# Altium PCB ProPrj_HTXStudio_OneHanded_Keyboard(1).PcbDoc (part 8 of 11)
Units mm, origin at the board's own origin, x right, y up, seen from the top; angles counter-clockwise.
Board outline 152.4 x 101.6 mm, 20 copper layers (F.Cu, F.Mask, B.Cu, B.Mask, In1.Cu, F.SilkS, In2.Cu, B.SilkS, F.Adhes, B.Adhes, F.Paste, B.Paste, Dwgs.User, Cmts.User, Eco1.User, Eco2.User, Edge.Cuts, Margin, B.CrtYd, F.CrtYd); 269 components, 0 nets, 747 pads, 1168 vias.
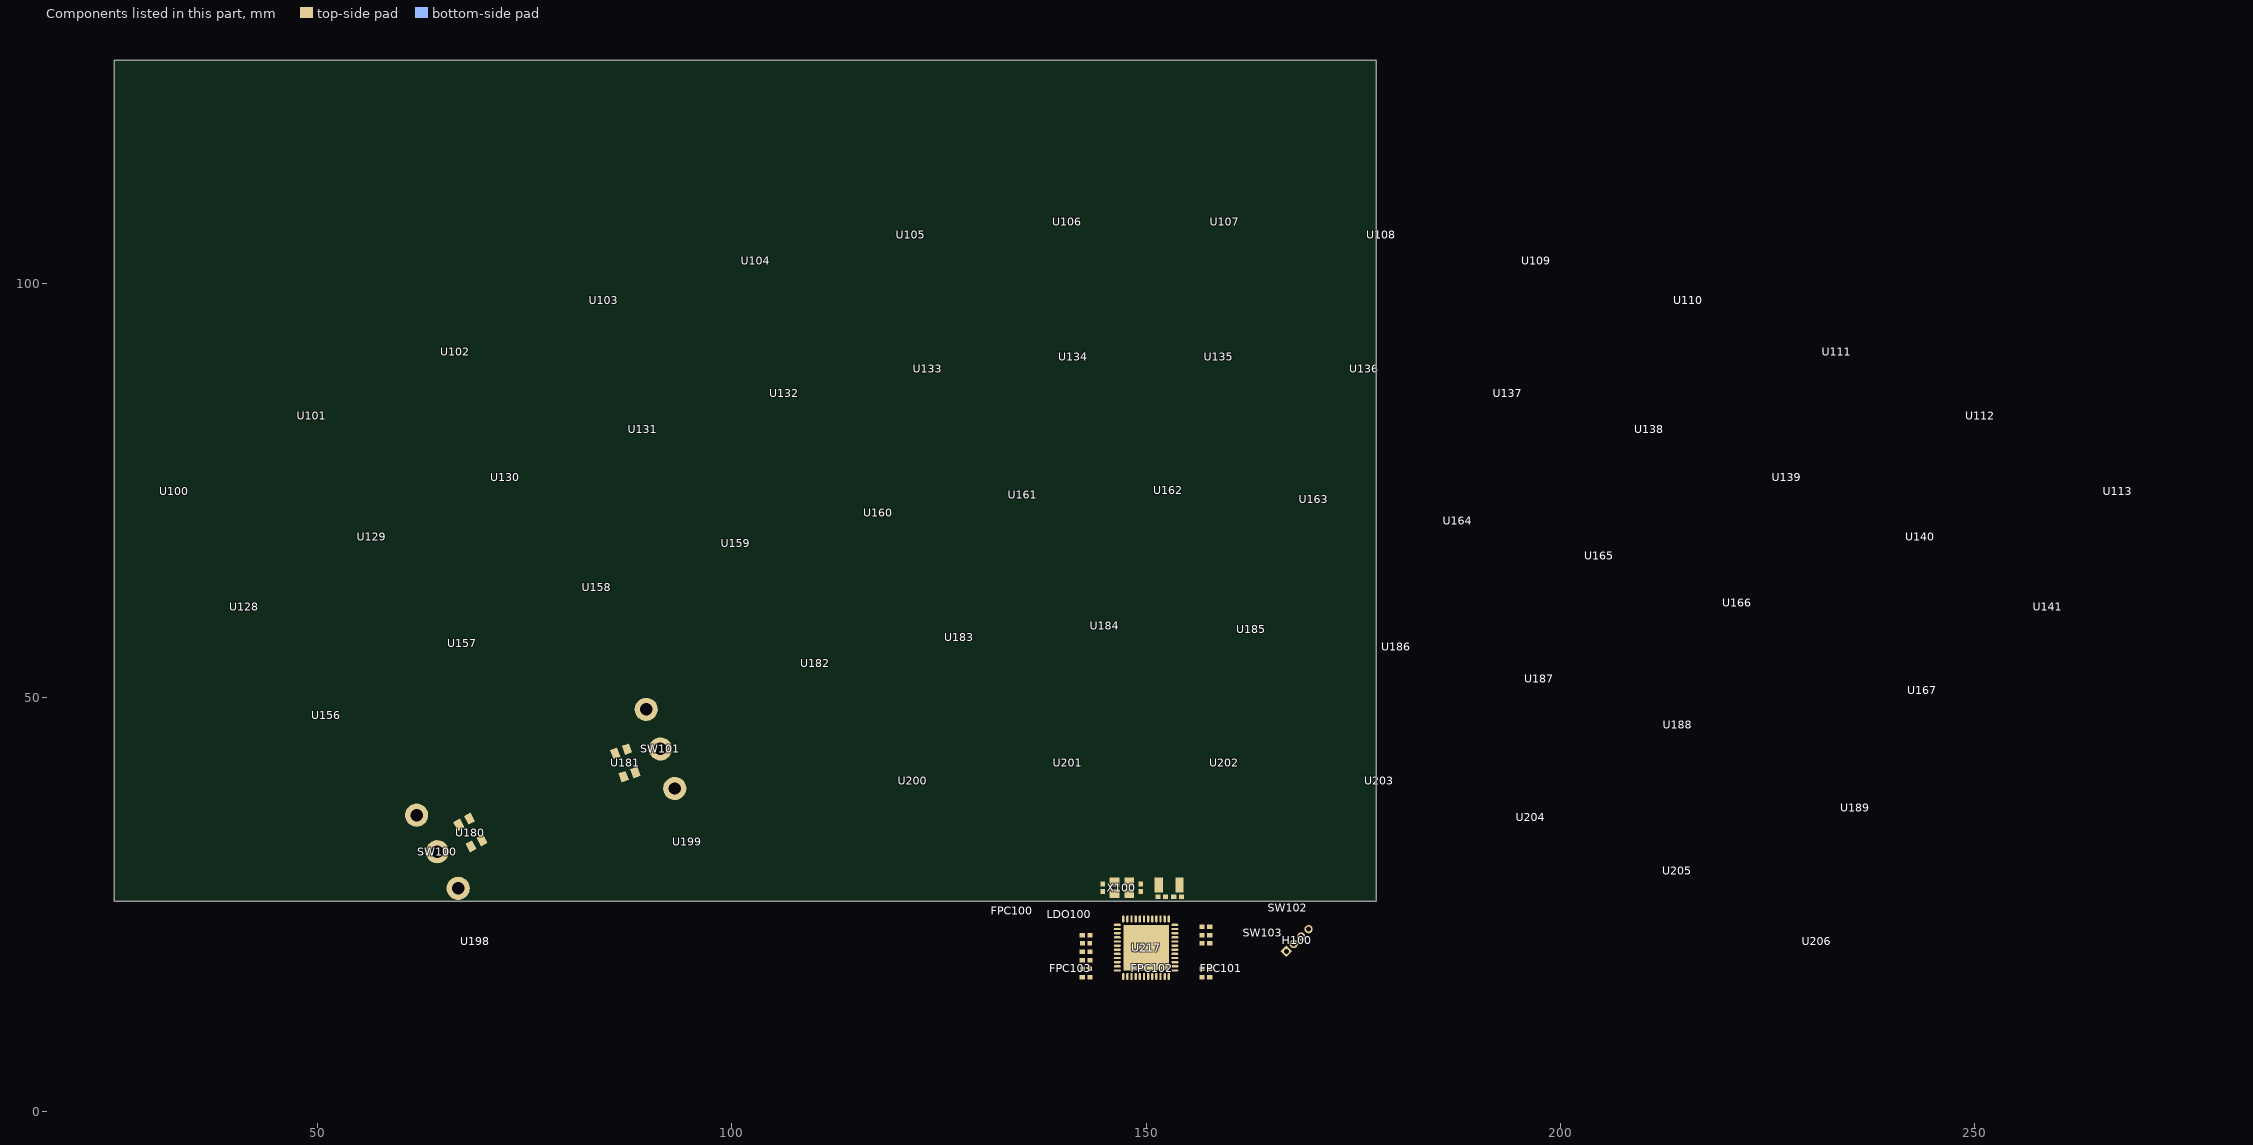
[diagram p20: the components of this part, seen from the top]

## Part data
C100 C101 C102 C103 C104 C105 C106 C107 C108 C109 C110 C111 C112 C113 C114 C115 C116 C117 C118 C119 C120 C121 C122 C123 C124 C125 C126 C127 C128 C129 C130 C131 C132 C133 C134 C135 C136 C137 C138 C139 C140 C141 C142 C143 C144 C145 C146 C147 C148 C149 C150 C151 C152 C153 C154 C155 C156: library part C0603, JLC_3DModel_Q=ac125912035d415993ca9572d50418b1, JLC_3D_Size="1.6 0.8", Manufacturer Part=CC0603KRX7R9BB104, MANUFACTURER=YAGEO(国巨), LCSC Part Name="100nF ±10% 50V", Datasheet=https://atta.szlcsc.com/upload/public/pdf/source/20180910/C282072_33301C7F631E79921B82A8DAC6BCC5B3.pdf, Description=容值:100nF;精度:±10%;额定电压:50V;材质(温度系数):X7R;, Supplier Part=C14663, Supplier=LCSC
C157 C158 C159 C160 C161 C162 C163 C164 C167: library part C0402, JLC_3DModel_Q=36a51122f27c49738f86b3bfa98863e0, JLC_3D_Size="1 0.5", Manufacturer Part=CL05B104KB54PNC, MANUFACTURER=SAMSUNG(三星), LCSC Part Name="100nF ±10% 50V", Datasheet=https://atta.szlcsc.com/upload/public/pdf/source/20160218/1457707763339.pdf, Description=容值:100nF;精度:±10%;额定电压:50V;材质(温度系数):X7R;, Supplier Part=C307331, Supplier=LCSC
C165 C166 C168 C169: library part C0402, JLC_3DModel_Q=36a51122f27c49738f86b3bfa98863e0, JLC_3D_Size="1 0.5", Manufacturer Part=CL05A105KA5NQNC, MANUFACTURER=SAMSUNG(三星), LCSC Part Name="1uF ±10% 25V", Datasheet=https://atta.szlcsc.com/upload/public/pdf/source/20160218/1457707763339.pdf, Description=容值:1uF;精度:±10%;额定电压:25V;材质(温度系数):X5R;, Supplier Part=C52923, Supplier=LCSC
C170 C171 C172 C173: library part C0402, JLC_3DModel_Q=36a51122f27c49738f86b3bfa98863e0, JLC_3D_Size="1 0.5"
  C170 C173: Datasheet=https://atta.szlcsc.com/upload/public/pdf/source/20201228/C882557_CC42579B2F91491CB41A68597C1310CF.pdf
  C171 C172: Datasheet=https://atta.szlcsc.com/upload/public/pdf/source/20180307/C76959_15204091273971407747.pdf
D100 D101 D102 D103 D104 D105 D106 D107 D108 D109 D110 D111 D112 D113 D114 D115 D116 D117 D118 D119 D120 D121 D122 D123 D124 D125 D126 D127 D128 D129 D130 D131 D132 D133 D134 D135 D136 D137 D138 D139 D142 D143 D144 D145 D146 D147 D148 D149 D150 D151 D152 D153 D154 D155 D156 D157 D158: library part SOD-323_L1.8-W1.3-LS2.5-RD, JLC_3DModel_Q=e9dd044ee7bf4221b3b795eb56bce7c0, JLC_3D_Size="2.5125 1.3", Manufacturer Part=1N4148WS, MANUFACTURER=CJ(江苏长电/长晶), LCSC Part Name=丝印T4, Datasheet=https://atta.szlcsc.com/upload/public/pdf/source/20140809/1457707208178.pdf, Description=二极管配置:独立式;正向压降(Vf):1.25V@150mA;直流反向耐压(Vr):100V;整流电流:150mA;反向恢复时间(trr):4ns;, Supplier Part=C2128, Supplier=LCSC
D140 D141: library part SOD-323_L1.8-W1.3-LS2.5-RD, JLC_3DModel_Q=e9dd044ee7bf4221b3b795eb56bce7c0, JLC_3D_Size="2.5125 1.3", Manufacturer Part=1N4148WS, MANUFACTURER=MDD(辰达半导体), LCSC Part Name="电压:100V 电流:150mA", Datasheet=https://atta.szlcsc.com/upload/public/pdf/source/20230823/12C4B88004F768DBC940AB716F9D26AA.pdf, Description=二极管配置:独立式;正向压降(Vf):1.25V@150mA;直流反向耐压(Vr):100V;整流电流:150mA;反向恢复时间(trr):4ns;, Supplier Part=C437156, Supplier=LCSC
D159: library part SOD-523_L1.2-W0.8-LS1.6-RD, JLC_3DModel_Q=8f56a03db567494d8f4c9d12aa52a741, JLC_3D_Size="1.6 0.8", Datasheet=https://atta.szlcsc.com/upload/public/pdf/source/20211010/C2841409_E778AEF8B577E7561120661F012F3EB1.pdf, Description=+3.3V
FPC100 FPC101 FPC102 FPC103: library part FPC-SMD_8P-P0.50_XUNPU_FPC-05FB-8PH20, JLC_3DModel_Q=d1fb114d2be449ed9091a3b3b78c5186, JLC_3D_Size="7.5 5.4", Manufacturer Part=FPC-05FB-8PH20, MANUFACTURER=XUNPU(讯普), LCSC Part Name="间距:0.5mm P数:8P 翻盖式 双侧触点/上下接", Datasheet=https://atta.szlcsc.com/upload/public/pdf/source/20210922/C2856828_96968FB666CC1781EEE4F204CBA73B0B.pdf, Description=锁定特性:翻盖式;触点类型:双侧触点/上下接;触点数量:8P;间距:0.5mm;安装类型:卧贴;工作温度范围:-25°C~+85°C;, Supplier Part=C2856828, Supplier=LCSC
H100: library part HDR-TH_4P-P1.27-V-M, JLC_3DModel_Q=b814cdb8716945979cbf9d23671a2fcd, JLC_3D_Size="5.08 2", Manufacturer Part=PZ127V-11-04-0720, MANUFACTURER=XFCN(兴飞), LCSC Part Name="间距:1.27mm 1x4P 直插", Datasheet=https://atta.szlcsc.com/upload/public/pdf/source/20200519/C541879_5CD99C402ABEE613587AE88FBA356357.pdf, Description=插针结构:1x4P;间距:1.27mm;行距:-;圆针/方针:-;安装类型:直插;排数:单排;总PIN位数:4P;额定电流:-;额定电压:-;配合针长度:3.9mm;塑高:1mm;端接针长度:2.3mm;触头材质:黄铜;触头镀层:-;工作温度范围:-40°C~+105°C;焊接温度(最大值):-;颜色:黑色;, Supplier Part=C541879, Supplier=LCSC
LDO100: library part SOT-23-5_L3.0-W1.7-P0.95-LS2.8-BL, JLC_3DModel_Q=0a2a1b8f50944f73965918ad6e5fe167, JLC_3D_Size="3.0125 2.9", Manufacturer Part=ME6211C33M5G-N, MANUFACTURER=MICRONE(南京微盟), LCSC Part Name="输入6V 输出3.3V 500mA", Datasheet=https://atta.szlcsc.com/upload/public/pdf/source/20170918/C82942_1505727073070976520.pdf, Description=输出类型:固定;工作电压:6V;输出电压:3.3V;输出电流:500mA;电源纹波抑制比(PSRR):70dB@(1kHz)；62dB@(10kHz);输出极性:正极;, Supplier Part=C82942, Supplier=LCSC
LED100: library part LED0603-RD_1, JLC_3DModel_Q=3beb0148d24d477aac1d9f7d4b6d534c, JLC_3D_Size="1.58 0.8", Manufacturer Part=NCD0603G1, MANUFACTURER=国星光电, Datasheet=https://atta.szlcsc.com/upload/public/pdf/source/20200820/C84267_04BA7703640BAC111D09F5EFB971FBF3.pdf, Description=发光颜色:翠绿色;正向电压(VF):2.6V~3.6V;功率:72mW;正向电流:10mA;主波长:515nm~530nm;透镜颜色:无色透明透镜;发光强度:330mcd~900mcd;发光角度:130°;工作温度:-30°C~+85°C;, Supplier Part=C84267, Supplier=LCSC, LCSC Part Name=NCD0603G1
R100 R101: library part R0402, JLC_3DModel_Q=98c88bc2b9094f218f3a3e30a7012738, JLC_3D_Size="1 0.5", Manufacturer Part=0402WGF0000TCE, MANUFACTURER=UNI-ROYAL(厚声), LCSC Part Name="0Ω ±1% 62.5mW 厚膜电阻", Datasheet=https://atta.szlcsc.com/upload/public/pdf/source/20200306/C422600_1E6D84923E4A46A82E41ADD87F860B5C.pdf, Description=电阻类型:厚膜电阻;阻值:0Ω;精度:±1%;功率:62.5mW;最大工作电压:50V;温度系数:±800ppm/°C;, Supplier Part=C17168, Supplier=LCSC
R102 R103: library part R0402, JLC_3DModel_Q=98c88bc2b9094f218f3a3e30a7012738, JLC_3D_Size="1 0.5", Manufacturer Part=0402WGF1002TCE, MANUFACTURER=UNI-ROYAL(厚声), LCSC Part Name="10kΩ ±1% 62.5mW 厚膜电阻", Datasheet=https://atta.szlcsc.com/upload/public/pdf/source/20200306/C422600_1E6D84923E4A46A82E41ADD87F860B5C.pdf, Description=电阻类型:厚膜电阻;阻值:10kΩ;精度:±1%;功率:62.5mW;最大工作电压:50V;温度系数:±100ppm/°C;, Supplier Part=C25744, Supplier=LCSC
R104: library part R0402, JLC_3DModel_Q=98c88bc2b9094f218f3a3e30a7012738, JLC_3D_Size="1 0.5", Manufacturer Part=0402WGF1001TCE, MANUFACTURER=UNI-ROYAL(厚声), LCSC Part Name="1kΩ ±1% 62.5mW 厚膜电阻", Datasheet=https://atta.szlcsc.com/upload/public/pdf/source/20200306/C422600_1E6D84923E4A46A82E41ADD87F860B5C.pdf, Description=电阻类型:厚膜电阻;阻值:1kΩ;精度:±1%;功率:62.5mW;最大工作电压:50V;温度系数:±100ppm/°C;, Supplier Part=C11702, Supplier=LCSC
SW100 SW101: library part SW-TH_K9-1267T, JLC_3DModel_Q=3f12526c1548481b9d332eb4c85a6eaf, JLC_3D_Size="12.7 5.74", Manufacturer Part=K9-1267T, MANUFACTURER=韩国韩荣, LCSC Part Name="12.7*5.7*7.5mm 插件微动开关", Datasheet=https://atta.szlcsc.com/upload/public/pdf/source/20170413/1492062748888.pdf, Description=类型:微动开关;电路结构:单刀双掷;额定电流(DC):100mA;额定电压(DC):30V;额定电流(AC):-;额定电压(AC):-;机械寿命:300万次;, Supplier Part=C107266, Supplier=LCSC
SW102 SW103: library part SW-SMD_4P-L3.7-W3.7-P2.70-LS3.7, JLC_3DModel_Q=0aed0e89e0464360a050f79406f78fe2, JLC_3D_Size="3.7 3.7", Manufacturer Part="TS3735A 250gf 030", MANUFACTURER="SHOU HAN(首韩)", LCSC Part Name="3.7*3.7*0.35mm 立贴 轻触开关", Datasheet=https://atta.szlcsc.com/upload/public/pdf/source/20211019/126A9D1EE678E2ED4D7ADF984A8B9751.pdf, Description=电路结构:单刀单掷;按钮形状:圆形按钮;作用力:2.5N;安装方式:立贴;开关长度:3.7mm;开关宽度:3.7mm;开关高度:0.35mm;带支架:不带;触点电流:50mA;额定电压(DC):12V;绝缘电阻:100MΩ;机械寿命:3万次;, Supplier Part=C2906282, Supplier=LCSC
U100 U101 U102 U103 U104 U105 U106 U107 U108 U109 U110 U111 U112 U113 U128 U129 U130 U131 U132 U133 U134 U135 U136 U137 U138 U139 U140 U141 U156 U157 U158 U159 U160 U161 U162 U163 U164 U165 U166 U167 U182 U183 U184 U185 U186 U187 U188 U189 U198 U199 U200 U201 U202 U203 U204 U205 U206: library part LED-SMD_L3.2-W2.8_YO-WS2812B-3528, JLC_3DModel_Q=50b5c877a7014002b5d06418ed12786b, JLC_3D_Size="5.88 2.81", Manufacturer Part=Yo-WS2812B-3528反贴雾状, Supplier Part=C9900003682, Supplier=LCSC, LCSC Part Name=Yo-WS2812B-3528反贴雾状
U114 U115 U116 U117 U118 U119 U120 U121 U122 U123 U124 U125 U126 U127 U142 U143 U144 U145 U146 U147 U148 U149 U150 U151 U152 U153 U154 U155 U168 U169 U170 U171 U172 U173 U174 U175 U176 U177 U178 U179 U190 U191 U192 U193 U194 U195 U196 U197 U207 U208 U209 U210 U211 U212 U213 U214 U215: library part SMD_KEYBOARD-SW, JLC_3DModel_Q=5c2d585f6c544fcf92e7ed163bda57d3, JLC_3D_Size="14.8 5.89", Manufacturer Part=CPG151101S11-16, MANUFACTURER=HanElectricity(瀚源), LCSC Part Name="热插拔底座连接器 键盘配件", Datasheet=https://atta.szlcsc.com/upload/public/pdf/source/20241016/CAB9C3DABBAD4306660C041376EEF732.pdf, Description="热插拔底座连接器 键盘配件", Supplier Part=C41430893, Supplier=LCSC
U180 U181: library part LED-SMD_4P-L3.5-W2.8-BR-1, JLC_3DModel_Q=907512da3103408981875e13a3705e44, JLC_3D_Size="3.5 2.8", Manufacturer Part=XL-3528RGBC-WS2812B, MANUFACTURER=XINGLIGHT(成兴光), Datasheet=https://atta.szlcsc.com/upload/public/pdf/source/20240613/4CD4F2CA4289EE385C338CCDDE94EC30.pdf, Supplier Part=C5440693, Supplier=LCSC, LCSC Part Name=XL-3528RGBC-WS2812B
U217: library part VQFN-48_L7.0-W7.0-P0.50-BL-EP5.5, JLC_3DModel_Q=ba31957982b742979967eb5b855489b6, JLC_3D_Size="7.002 7.002", Manufacturer Part=STM32G431CBU6, MANUFACTURER=ST(意法半导体), LCSC Part Name="带DSP和FPU的170MHz主流ARM Cortex-M4 MCU，具有128 KB Flash存储器、数学加速器和中等模拟电平集成", Datasheet=https://atta.szlcsc.com/upload/public/pdf/source/20200511/C529354_7C66CF00837B904D0C15DCE45B69418C.pdf, Description=CPU内核:ARM-M系列;CPU最大主频:170MHz;应用领域:-;, Supplier Part=C529356, Supplier=LCSC
X100: library part CRYSTAL-SMD_4P-L3.2-W2.5-BL, JLC_3DModel_Q=1840cb1b89674ca18acb69eedbab271b, JLC_3D_Size="3.2 2.5", Manufacturer Part=X32258MSB4SI, MANUFACTURER=YXC(扬兴晶振), LCSC Part Name="8MHz ±10ppm 20pF", Datasheet=https://atta.szlcsc.com/upload/public/pdf/source/20240329/19D5F850207469550BEB00D7DFEDBC7A.pdf, Description=晶振类型:贴片晶振;频率:8MHz;常温频差:±10ppm;负载电容:20pF;频率稳定度:±20ppm;, Supplier Part=C2682774, Supplier=LCSC
X101: library part FC-135R_L3.2-W1.5, JLC_3DModel_Q=751105e878f044059ef0ee72de95f96e, JLC_3D_Size="3.2 1.5", Manufacturer Part=Q13FC13500004, MANUFACTURER=EPSON(爱普生), LCSC Part Name="32.768kHz ±20ppm 12.5pF", Datasheet=https://atta.szlcsc.com/upload/public/pdf/source/20240418/0E0FF5F0356BA3753F616001439D1416.pdf, Description=晶振类型:贴片晶振;频率:32.768kHz;常温频差:±20ppm;负载电容:12.5pF;, Supplier Part=C32346, Supplier=LCSC

## Via types
v1: diameter 0.5, hole 0.3, F.Cu to B.Cu, tented both sides, 1168 vias

## Nets (pads, with @x,y where several pads share a name; then routed paths per layer and width w, separated by ;. In a path a pad name is that pad's centre, name@x,y a point inside that pad or via, vN(x,y) a via of type N, cw(c..) or ccw(c..) an arc to the next point about the centre after c; other vN are vias at no path point)
pads on no net: C100.1 C100.2 C101.1 C101.2 C102.1 C102.2 C103.1 C103.2 C104.1 C104.2 C105.1 C105.2 C106.1 C106.2 C107.1 C107.2 C108.1 C108.2 C109.1 C109.2 C110.1 C110.2 C111.1 C111.2 C112.1 C112.2 C113.1 C113.2 C114.1 C114.2 C115.1 C115.2 C116.1 C116.2 C117.1 C117.2 C118.1 C118.2 C119.1 C119.2 C120.1 C120.2 C121.1 C121.2 C122.1 C122.2 C123.1 C123.2 C124.1 C124.2 C125.1 C125.2 C126.1 C126.2 C127.1 C127.2 C128.1 C128.2 C129.1 C129.2 C130.1 C130.2 C131.1 C131.2 C132.1 C132.2 C133.1 C133.2 C134.1 C134.2 C135.1 C135.2 C136.1 C136.2 C137.1 C137.2 C138.1 C138.2 C139.1 C139.2 C140.1 C140.2 C141.1 C141.2 C142.1 C142.2 C143.1 C143.2 C144.1 C144.2 C145.1 C145.2 C146.1 C146.2 C147.1 C147.2 C148.1 C148.2 C149.1 C149.2 C150.1 C150.2 C151.1 C151.2 C152.1 C152.2 C153.1 C153.2 C154.1 C154.2 C155.1 C155.2 C156.1 C156.2 C157.1 C157.2 C158.1 C158.2 C159.1 C159.2 C160.1 C160.2 C161.1 C161.2 C162.1 C162.2 C163.1 C163.2 C164.1 C164.2 C165.1 C165.2 C166.1 C166.2 C167.1 C167.2 C168.1 C168.2 C169.1 C169.2 C170.1 C170.2 C171.1 C171.2 C172.1 C172.2 C173.1 C173.2 D100.1 D100.2 D101.1 D101.2 D102.1 D102.2 D103.1 D103.2 D104.1 D104.2 D105.1 D105.2 D106.1 D106.2 D107.1 D107.2 D108.1 D108.2 D109.1 D109.2 D110.1 D110.2 D111.1 D111.2 D112.1 D112.2 D113.1 D113.2 D114.1 D114.2 D115.1 D115.2 D116.1 D116.2 D117.1 D117.2 D118.1 D118.2 D119.1 D119.2 D120.1 D120.2 D121.1 D121.2 D122.1 D122.2 D123.1 D123.2 D124.1 D124.2 D125.1 D125.2 D126.1 D126.2 D127.1 D127.2 D128.1 D128.2 D129.1 D129.2 D130.1 D130.2 D131.1 D131.2 D132.1 D132.2 D133.1 D133.2 D134.1 D134.2 D135.1 D135.2 D136.1 D136.2 D137.1 D137.2 D138.1 D138.2 D139.1 D139.2 D140.1 D140.2 D141.1 D141.2 D142.1 D142.2 D143.1 D143.2 D144.1 D144.2 D145.1 D145.2 D146.1 D146.2 D147.1 D147.2 D148.1 D148.2 D149.1 D149.2 D150.1 D150.2 D151.1 D151.2 D152.1 D152.2 D153.1 D153.2 D154.1 D154.2 D155.1 D155.2 D156.1 D156.2 D157.1 D157.2 D158.1 D158.2 D159.1 D159.2 FPC100.1 FPC100.2 FPC100.3 FPC100.4 FPC100.5 FPC100.6 FPC100.7 FPC100.8 FPC100.9 FPC100.10 FPC101.1 FPC101.2 FPC101.3 FPC101.4 FPC101.5 FPC101.6 FPC101.7 FPC101.8 FPC101.9 FPC101.10 FPC102.1 FPC102.2 FPC102.3 FPC102.4 FPC102.5 FPC102.6 FPC102.7 FPC102.8 FPC102.9 FPC103.1 FPC103.2 FPC103.3 FPC103.4 FPC103.5 FPC103.6 FPC103.7 FPC103.8 FPC103.9 FPC103.10 H100.1 H100.2 H100.3 H100.4 LDO100.1 LDO100.2 LDO100.3 LDO100.4 LDO100.5 LED100.1 LED100.2 R100.1 R100.2 R101.1 R101.2 R102.1 R102.2 R103.1 R103.2 R104.1 R104.2 SW100.1 SW100.2 SW100.3 SW101.1 SW101.2 SW101.3 SW102.1 SW102.2 SW102.3 SW102.4 SW103.1 SW103.2 SW103.3 SW103.4 U100.1 U100.2 U100.3 U100.4 U101.1 U101.2 U101.3 U101.4 U102.1 U102.2 U102.3 U102.4 U103.1 U103.2 U103.3 U103.4 U104.1 U104.2 U104.3 U104.4 U105.1 U105.2 U105.3 U105.4 U106.1 U106.2 U106.3 U106.4 U107.1 U107.2 U107.3 U107.4 U108.1 U108.2 U108.3 U108.4 U109.1 U109.2 U109.3 U109.4 U110.1 U110.2 U110.3 U110.4 U111.1 U111.2 U111.3 U111.4 U112.1 U112.2 U112.3 U112.4 U113.1 U113.2 U113.3 U113.4 U114.1 U114.2 U115.1 U115.2 U116.1 U116.2 U117.1 U117.2 U118.1 U118.2 U119.1 U119.2 U120.1 U120.2 U121.1 U121.2 U122.1 U122.2 U123.1 U123.2 U124.1 U124.2 U125.1 U125.2 U126.1 U126.2 U127.1 U127.2 U128.1 U128.2 U128.3 U128.4 U129.1 U129.2 U129.3 U129.4 U130.1 U130.2 U130.3 U130.4 U131.1 U131.2 U131.3 U131.4 U132.1 U132.2 U132.3 U132.4 U133.1 U133.2 U133.3 U133.4 U134.1 U134.2 U134.3 U134.4 U135.1 U135.2 U135.3 U135.4 U136.1 U136.2 U136.3 U136.4 U137.1 U137.2 U137.3 U137.4 U138.1 U138.2 U138.3 U138.4 U139.1 U139.2 U139.3 U139.4 U140.1 U140.2 U140.3 U140.4 U141.1 U141.2 U141.3 U141.4 U142.1 U142.2 U143.1 U143.2 U144.1 U144.2 U145.1 U145.2 U146.1 U146.2 U147.1 U147.2 U148.1 U148.2 U149.1 U149.2 U150.1 U150.2 U151.1 U151.2 U152.1 U152.2 U153.1 U153.2 U154.1 U154.2 U155.1 U155.2 U156.1 U156.2 U156.3 U156.4 U157.1 U157.2 U157.3 U157.4 U158.1 U158.2 U158.3 U158.4 U159.1 U159.2 U159.3 U159.4 U160.1 U160.2 U160.3 U160.4 U161.1 U161.2 U161.3 U161.4 U162.1 U162.2 U162.3 U162.4 U163.1 U163.2 U163.3 U163.4 U164.1 U164.2 U164.3 U164.4 U165.1 U165.2 U165.3 U165.4 U166.1 U166.2 U166.3 U166.4 U167.1 U167.2 U167.3 U167.4 U168.1 U168.2 U169.1 U169.2 U170.1 U170.2 U171.1 U171.2 U172.1 U172.2 U173.1 U173.2 U174.1 U174.2 U175.1 U175.2 U176.1 U176.2 U177.1 U177.2 U178.1 U178.2 U179.1 U179.2 U180.1 U180.2 U180.3 U180.4 U181.1 U181.2 U181.3 U181.4 U182.1 U182.2 U182.3 U182.4 U183.1 U183.2 U183.3 U183.4 U184.1 U184.2 U184.3 U184.4 U185.1 U185.2 U185.3 U185.4 U186.1 U186.2 U186.3 U186.4 U187.1 U187.2 U187.3 U187.4 U188.1 U188.2 U188.3 U188.4 U189.1 U189.2 U189.3 U189.4 U190.1 U190.2 U191.1 U191.2 U192.1 U192.2 U193.1 U193.2 U194.1 U194.2 U195.1 U195.2 U196.1 U196.2 U197.1 U197.2 U198.1 U198.2 U198.3 U198.4 U199.1 U199.2 U199.3 U199.4 U200.1 U200.2 U200.3 U200.4 U201.1 U201.2 U201.3 U201.4 U202.1 U202.2 U202.3 U202.4 U203.1 U203.2 U203.3 U203.4 U204.1 U204.2 U204.3 U204.4 U205.1 U205.2 U205.3 U205.4 U206.1 U206.2 U206.3 U206.4 U207.1 U207.2 U208.1 U208.2 U209.1 U209.2 U210.1 U210.2 U211.1 U211.2 U212.1 U212.2 U213.1 U213.2 U214.1 U214.2 U215.1 U215.2 U217.1 U217.2 U217.3 U217.4 U217.5 U217.6 U217.7 U217.8 U217.9 U217.10 U217.11 U217.12 U217.13 U217.14 U217.15 U217.16 U217.17 U217.18 U217.19 U217.20 U217.21 U217.22 U217.23 U217.24 U217.25 U217.26 U217.27 U217.28 U217.29 U217.30 U217.31 U217.32 U217.33 U217.34 U217.35 U217.36 U217.37 U217.38 U217.39 U217.40 U217.41 U217.42 U217.43 U217.44 U217.45 U217.46 U217.47 U217.48 U217.49 X100.1 X100.2 X100.3 X100.4 X101.1 X101.2